# Altium PCB canpowermonitor_micro.PcbDoc
Units mm, origin at the board's own origin, x right, y up, seen from the top; angles counter-clockwise.
Board outline 13 x 33 mm, 2 copper layers (Top Layer, Bottom Layer); 18 components, 23 nets, 108 pads, 64 vias.
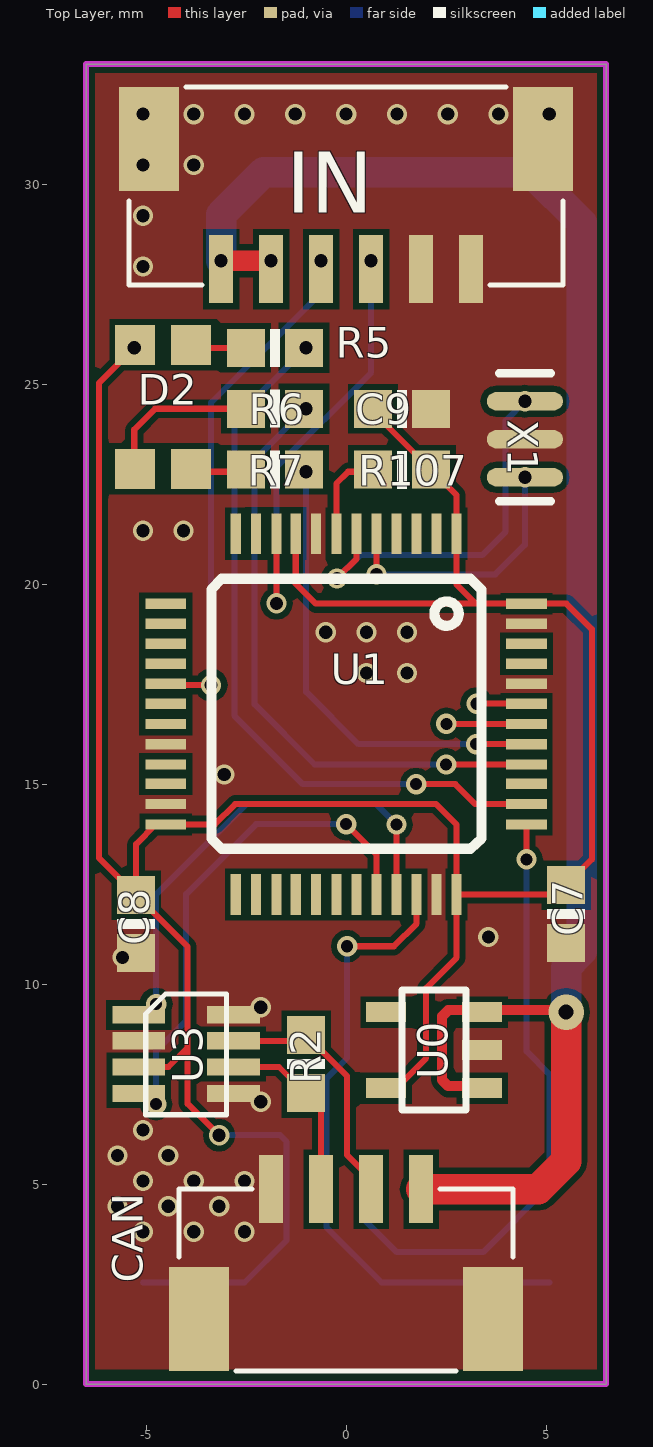
[diagram p0: Top Layer view]
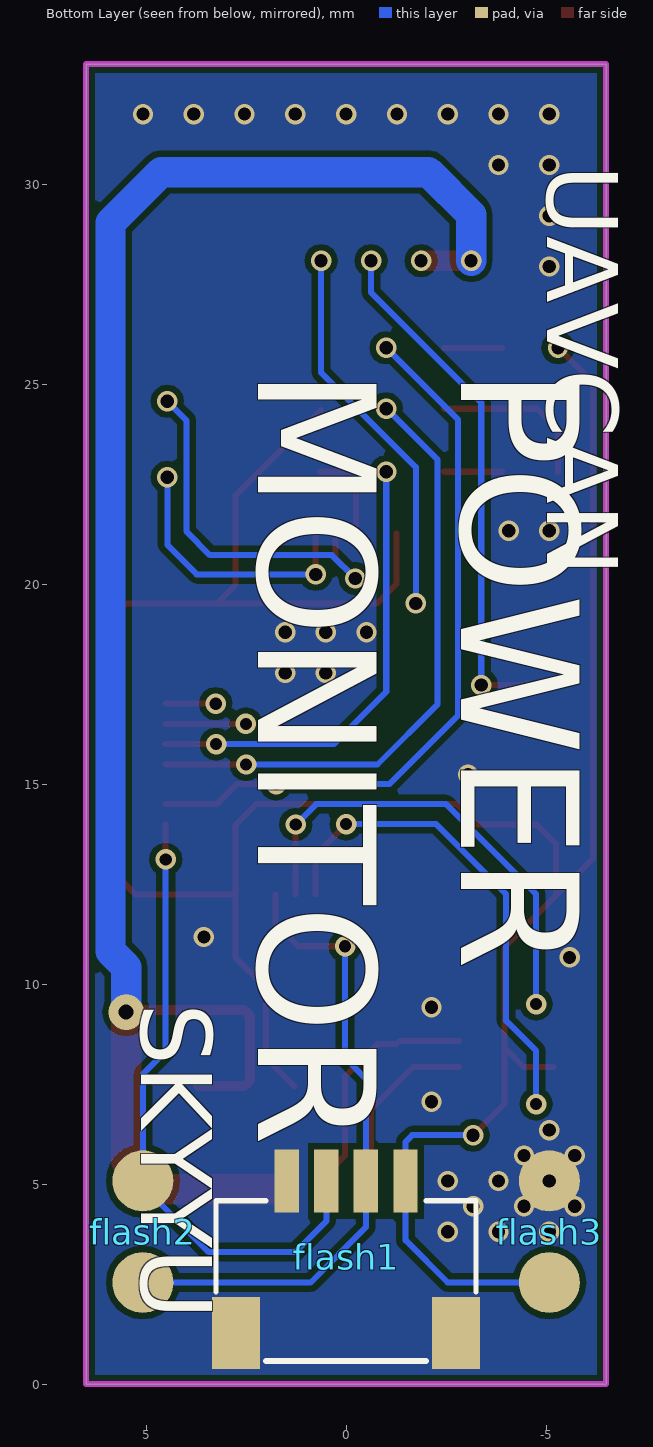
[diagram p1: Bottom Layer view, seen from below]
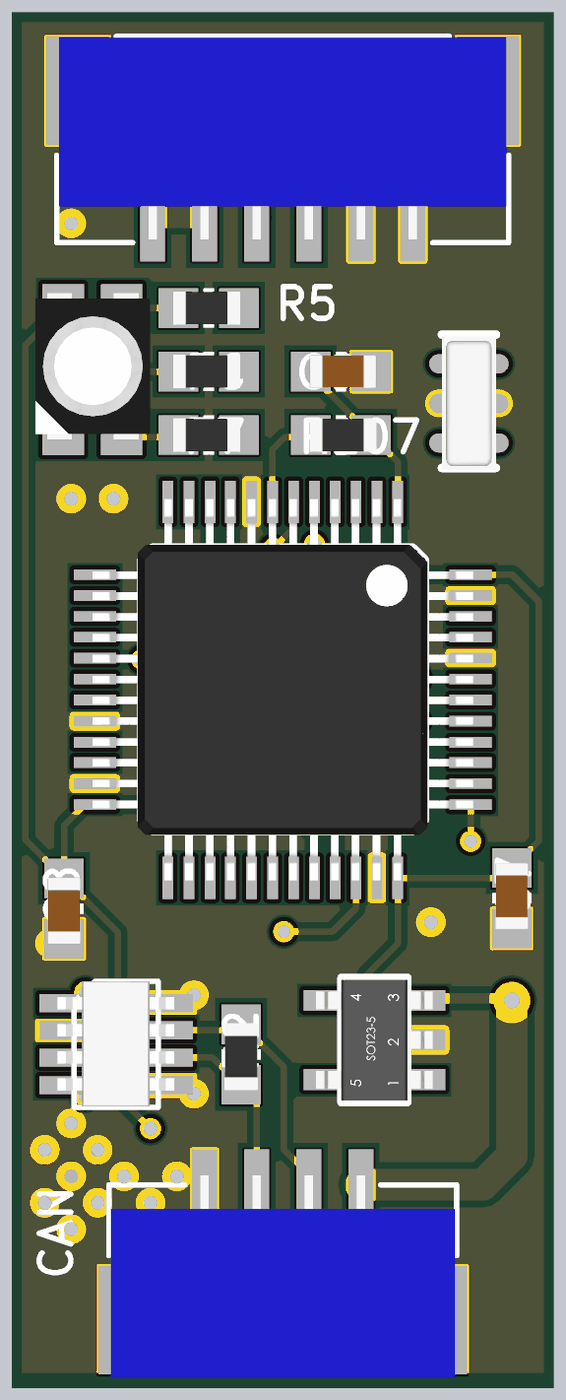
[diagram p2: 3D render of the assembled board from above, using the file's embedded part models]

## Layer stack, top to bottom
Top Solder: solder mask 0.0102, Solder Resist, Dk 3.5
Top Layer: signal copper 0.0356
Dielectric 1: dielectric 0.32, FR-4, Dk 4.8
Bottom Layer: signal copper 0.0356
Bottom Solder: solder mask 0.0102, Solder Resist, Dk 3.5

## Board outline
-6.5,0 6.5,0 6.5,33 -6.5,33

## Design rules (kind name [scope] priority, off if disabled: settings)
Clearance [All] p1: gap=0.152
ComponentClearance [All] p1 off: gap=0.254 collisioncheckmode=3 verticalgap=0.254 showdistances=FALSE
PolygonConnect [All] p1: connectstyle=Direct reliefconductorwidth=0.065 reliefentries=4 polygonreliefangle="90 Angle" airgapwidth=0
RoutingVias [All] p1: holewidth=0.711 width=1.27 viastyle="Through Hole" minholewidth=0.711 minwidth=1.27 maxholewidth=0.711 maxwidth=1.27
SolderMaskExpansion [All] p1: expansion=0.102
Width [All] p1: maxlimit=0.762 minlimit=0.152 preferedwidth=0.254
29 further rules are at their usual default settings.

## Components (designator, comment, footprint, x,y, rotation, side; value= is the part's Value field where it differs from the comment)
C7 "0.1uF" C0603 5.5,11.75 r90 top
C8 "0.1uF" C0603 -5.25,11.5 r270 top
C9 "0.1uF" C0603 1.397,24.384 r0 top
CAN "J-GH1.25-04P" SM04B-GHS-TB 0,3.75 r180 top
D2 "RGB_3528" RGB_3528 -4.572,24.384 r270 top
flash1 "J-SH1.0-04P" SM04B-SRSS-TB 0,5.08 r0 bottom locked
flash2 "PAD2" PAD2_2.54 5.08,3.81 r270 bottom
flash3 "PAD2" PAD2_2.54 -5.08,3.81 r270 bottom
IN "J-GH1.25-06P" SM06B-GHS-TB 0,29 r0 top
R2 "120" R0603 -1,8 r270 top
R5 "10k" R0603 -1.778,25.908 r180 top
R6 "10k" R0603 -1.778,24.384 r180 top
R7 "10k" R0603 -1.778,22.86 r180 top
R107 "10K" R0603 1.397,22.86 r0 top
U0 "MIC5205" SOT23-5 2.2,8.35 r180 top
U1 "STM32F103C8Tx" LQFP48 0,16.75 r270 top
U3 "MAX3051" SOT23-8 -4,8.25 r0 top
X1 "CSTCE8M" XTAL-CSTCE 4.47,23.622 r90 top

## Footprints (in the part's own frame and the unit in brackets; to place one, negate y for a bottom-side part, rotate by r counter-clockwise, add the part's x,y. Pads: shape width x height; smd on the part's side, far side on the other; paste and mask are expansions set on the pad)
C0603 [mm]
  rect 0.95x0.95 smd mask+0.051: 1(-0.725,0) 2(0.725,0)
  silkscreen extent -0.13,-0.48 0.13,0.47, body extent -0.75,-0.4 0.85,0.4, height 0.6
LQFP48 [mil]
  rect 40x10 smd: 1(-177.58,108.68) 2(-177.58,89) 3(-177.58,69.31) 4(-177.58,49.63) 5(-177.58,29.94) 6(-177.58,10.26) 7(-177.58,-9.58) 8(-177.58,-29.58) 9(-177.58,-49.58) 10(-177.58,-68.58) 11(-177.58,-88.58) 12(-177.58,-108.58) 25(177.58,-108.58) 26(177.58,-88.58) 27(177.58,-68.58) 28(177.58,-49.58) 29(177.58,-29.58) 30(177.58,-9.58) 31(177.58,10.26) 32(177.58,29.94) 33(177.58,49.63) 34(177.58,69.31) 35(177.58,89) 36(177.58,108.68)
  rect 10x40 smd: 13(-108.68,-177.58) 14(-89,-177.58) 15(-69.31,-177.58) 16(-49.63,-177.58) 17(-29.94,-177.58) 18(-10.26,-177.58) 19(9.58,-177.58) 20(29.58,-177.58) 21(49.58,-177.58) 22(68.58,-177.58) 23(88.58,-177.58) 24(108.58,-177.58) 37(108.58,177.58) 38(88.58,177.58) 39(68.58,177.58) 40(49.58,177.58) 41(29.58,177.58) 42(9.58,177.58) 43(-10.26,177.58) 44(-29.94,177.58) 45(-49.63,177.58) 46(-69.31,177.58) 47(-89,177.58) 48(-108.68,177.58)
  silkscreen extent -133,-133 133,133, body extent -180,-180 180,180, height 64
PAD2_2.54 [mil]
  round 60 smd: 1(50,0) 2(-50,0)
R0603 [mm]
  rect 0.95x0.95 smd mask+0.051: 1(-0.725,0) 2(0.725,0)
  silkscreen extent -0.13,-0.48 0.13,0.47, body extent -0.75,-0.4 0.85,0.4, height 0.4
RGB_3528 [mm]
  rect 1x1 smd: 1(-1.6,-0.7) 2(-1.6,0.7) 3(1.5,0.7) 4(1.5,-0.7)
  body extent -1.88,-1.36 1.62,1.39, height 1.95
SM04B-GHS-TB [mm]
  rect 0.6x1.7 smd mask+0.051: 1(-1.875,-1.125) 2(-0.625,-1.125) 3(0.625,-1.125) 4(1.875,-1.125)
  rect 1.5x2.6 smd mask+0.051: GND(-3.675,2.125) GND(3.675,2.125)
  silkscreen extent -4.18,-1.12 4.17,3.43, body extent -4.13,-1.35 4.13,3.5, height 4.25
SM04B-SRSS-TB [mil]
  rect 24x62 smd mask+2: 1(-58.5,0) 2(-19.5,0) 3(19.5,0) 4(58.5,0)
  rect 47.24x70.87 smd mask+2: GND(-108.27,149.61) GND(108.27,149.61)
  silkscreen extent -128,19 128,177, body extent -118,-18 118,177, height 116
SM06B-GHS-TB [mm]
  rect 0.6x1.7 smd mask+0.051: 1(-3.125,-1.125) 2(-1.875,-1.125) 3(-0.625,-1.125) 4(0.625,-1.125) 5(1.875,-1.125) 6(3.125,-1.125)
  rect 1.5x2.6 smd mask+0.051: GND(-4.925,2.125) GND(4.925,2.125)
  silkscreen extent -5.43,-1.52 5.43,3.43, body extent -5.38,-1.45 5.38,3.4, height 4.25
SOT23-5 [mm]
  rect 1x0.5 smd: 1(-1.2,0.95) 2(-1.2,0) 3(-1.2,-0.95) 4(1.2,-0.95) 5(1.2,0.95)
  silkscreen extent -0.8,-1.5 0.8,1.5, body extent -1.4,-1.45 1.4,1.45, height 1.09
SOT23-8 [mil]
  rect 52x17 smd: 1(-46.63,38.69) 2(-46.63,13.1) 3(-46.63,-12.69) 4(-46.63,-38.69) 5(46.63,-38.69) 6(46.63,-12.69) 7(46.63,13.1) 8(46.63,38.69)
  silkscreen extent -40,-60 40,59, body extent -56,-59 55,59, height 44
XTAL-CSTCE [mil]
  rrect100% 18x75 smd: 1(-37.4,0) 2(0,0) 3(37.4,0)
  silkscreen extent -61,-26 65,26, body extent -63,-26 63,26, height 40

## Part data
C7 C8 C9: library part Capacitor
R2 R5 R6 R7 R107: library part Resistor

## Via types
v1: diameter 0.508, hole 0.33, Top Layer to Bottom Layer, 52 vias
v2: diameter 0.508, hole 0.305, Top Layer to Bottom Layer, 11 vias
v3: diameter 0.889, hole 0.381, Top Layer to Bottom Layer, 1 vias

## Nets (pads, with @x,y where several pads share a name; then routed paths per layer and width w, separated by ;. In a path a pad name is that pad's centre, name@x,y a point inside that pad or via, vN(x,y) a via of type N, cw(c..) or ccw(c..) an arc to the next point about the centre after c; other vN are vias at no path point)
3.3V: C7.2 C8.1 C9.1 D2.1 flash1.1 flash3.1 R107.2 U0.5 U1.1 U1.9 U1.24 U1.36 U1.48 U3.3 | length 72.7
  Top Layer w0.152: v1(-5.297,25.908) -6.176,25.03 -6.176,13.151 C8.1 ; U3.3 -4.442,7.928 -3.962,8.407 ; v1(-3.175,6.223) -3.962,7.01 -3.962,8.407 ; U1.9 -1.259,20.009 -0.761,19.511 3.239,19.511 ; C9.1@0.635,24.347 2.761,22.221 2.761,19.989 3.239,19.511 ; U0.5@1.3,7.45 2,8.15 2,9.9 2.761,10.661 2.761,13.989 2.25,14.5 -2.772,14.5 -3.28,13.992 -4.758,13.992 -5.25,13.5 C8.1 ; U1.36 5.264,12.239 C7.2 6.143,13.118 6.143,18.876 5.508,19.511 3.239,19.511 ; C8.1 -3.962,10.937 -3.962,8.407
  Bottom Layer w0.152: flash3.1 -2.54,2.54 -1.486,3.594 -1.486,6.058 -1.651,6.223 v1@-3.302,6.223
CANH: CAN.2 R2.1 U3.7 | length 5.9
  Top Layer w0.152: U3.7 R2.1@-1.333,8.583 ; R2.1@-1.25,8.5 -0.775,8.5 0.025,7.7 0.025,5.725 CAN.2@0.625,5.125
CANL: CAN.3 R2.2 U3.6 | length 4.6
  Top Layer w0.152: U3.6 -1.678,7.928 -0.625,6.875 CAN.3
GND: C7.1 C8.2 C9.2 CAN.4 CAN.GND flash1.4 flash1.GND flash3.2 IN.5 IN.6 IN.GND U0.2 U1.8 U1.20 U1.23 U1.35 U1.44 U1.47 U3.2 U3.5 U3.8 X1.2
  other v1: -5.08,3.81 -3.81,3.81 -2.54,3.81 -5.715,4.445 -4.445,4.445 -3.175,4.445 -5.08,5.08 -3.81,5.08 -2.54,5.08 -5.715,5.715 -4.445,5.715 -5.08,6.35 -2.134,7.061 -2.134,9.423 -5.588,10.668 3.556,11.176 -3.048,15.24 0.508,17.78 1.524,17.78 -0.508,18.796 0.508,18.796 1.524,18.796 -5.08,21.336 -4.064,21.336 -5.08,27.94 -5.08,29.21 -5.08,30.48 -3.81,30.48 -5.08,31.75 -3.81,31.75 -2.54,31.75 -1.27,31.75 0,31.75 1.27,31.75 2.54,31.75 3.81,31.75 5.08,31.75
NetD2_2: D2.2 R5.2 | length 1.4
  Top Layer w0.152: D2.2@-3.897,25.908 R5.2@-2.452,25.908
NetD2_3: D2.3 R7.2 | length 1.4
  Top Layer w0.152: D2.3@-3.896,22.809 R7.2@-2.452,22.809
NetD2_4: D2.4 R6.2 | length 4.1
  Top Layer w0.152: D2.4@-5.297,22.808 -5.297,23.862 -4.775,24.384 R6.2@-2.452,24.384
Netflash1_2: flash1.2 flash2.1 U1.34 | length 16.1
  Top Layer w0.152: v2(0.025,10.947) 1.194,10.947 1.761,11.514 U1.34
  Bottom Layer w0.152: v2(0.025,10.947) 0.025,8.153 -0.495,7.633 -0.495,3.924 0.889,2.54 flash2.1
Netflash1_3: flash1.3 flash2.2 U1.37 | length 15.9
  Top Layer w0.152: v2(4.511,13.118) U1.37
  Bottom Layer w0.152: flash1.3 0.495,4.077 1.27,3.302 3.429,3.302 5.08,4.953 5.08,7.747 4.511,8.316 v2(4.511,13.118)
NetIN_3: IN.3 U1.17 | length 12.9
  Top Layer w0.152: U1.17 -4.475,17.475 v1(-3.378,17.475)
  Bottom Layer w0.152: v1(-3.378,17.475) -3.378,24.536 -0.625,27.29 v1(-0.625,28.085)
NetIN_4: IN.4 U1.10 | length 11.3
  Top Layer w0.152: v1(-1.742,19.518) U1.10
  Bottom Layer w0.152: v1(-1.742,19.518) -1.742,22.921 0.625,25.288 v1(0.625,28.085)
NetR5_1: R5.1 U1.38 | length 18.2
  Top Layer w0.152: v2(1.75,15) 2.729,15 3.229,14.5 U1.38
  Bottom Layer w0.152: v1(-1.002,25.908) -2.794,24.116 -2.794,16.713 -1.081,15 v2(1.75,15)
NetR6_1: R6.1 U1.40 | length 15.4
  Top Layer w0.152: v2(2.5,15.491) U1.40
  Bottom Layer w0.152: v1@-0.991,24.409 -2.286,23.114 -2.286,16.993 -0.784,15.491 v2(2.5,15.491)
  other v1: -1.002,24.384
NetR7_1: R7.1 U1.41 | length 11.6
  Top Layer w0.152: v2@3.25,15.999 U1.41
  Bottom Layer w0.152: v1(-1.002,22.809) -1.002,17.309 0.307,16 v2(3.25,16)
NetR107_1: R107.1 U1.7 | length 2.3
  Top Layer w0.152: U1.7 -0.243,22.515 0.051,22.809 R107.1@0.647,22.809
NetU1_5: U1.5 X1.1 | length 6.7
  Top Layer w0.152: v1(0.761,20.244) U1.5
  Bottom Layer w0.152: v1(0.761,20.244) 3.734,20.244 4.47,20.98 v1(4.47,22.672)
NetU1_6: U1.6 X1.3 | length 9.5
  Top Layer w0.152: v1(-0.229,20.142) 0.261,20.631 U1.6
  Bottom Layer w0.152: v1(-0.229,20.142) 0.356,20.726 3.404,20.726 3.988,21.311 3.988,24.089 v1(4.47,24.572)
NetU1_18: U1.18
NetU1_32: U1.32 U3.4 | length 12.4
  Top Layer w0.152: v2(0,14) 0.761,13.239 U1.32
  Bottom Layer w0.152: v2(-4.75,7) -4.75,8.331 -4,9.081 -4,12.25 -2.25,14 v2(0,14)
NetU1_33: U1.33 U3.1 | length 11.7
  Top Layer w0.152: U1.33 v2(1.261,13.989)
  Bottom Layer w0.152: v2(-4.75,9.5) -4.75,12.25 -2.5,14.5 0.75,14.5 v2(1.261,13.989)
NetU1_42: U1.42 | length 2
  Top Layer w0.152: v2(2.507,16.507) U1.42
NetU1_43: U1.43 | length 1.3
  Top Layer w0.152: v2(3.261,17.011) U1.43
VIN: CAN.1 IN.1 IN.2 U0.1 U0.3 | length 46
  Top Layer w0.254: U0.1@3.7,7.45 2.55,7.45 2.4,7.6 2.4,9.2 2.55,9.35 5.399,9.35 v3@5.5,9.249
  Top Layer w0.508: v1(-3.125,28.085) v1(-1.875,28.085)
  Top Layer w0.762: CAN.1 4.799,4.875 5.5,5.576 v3@5.5,9.249
  Bottom Layer w0.762: v1@-3.128,28.085 -3.128,29.232 -2.057,30.302 4.623,30.302 5.89,29.035 5.89,10.818 5.5,10.428 v3(5.5,9.3)
pads on no net: U0.4 U1.2 U1.3 U1.4 U1.11 U1.12 U1.13 U1.14 U1.15 U1.16 U1.19 U1.21 U1.22 U1.25 U1.26 U1.27 U1.28 U1.29 U1.30 U1.31 U1.39 U1.45 U1.46

## Polygon pours and split planes (outlines as drawn)
GND on Top Layer "Top Layer-No Net" (solid, remove dead copper, pour order 8): -7.646,34.233 7.594,34.233 7.594,0.37 -7.646,0.37
GND on Bottom Layer "Top Layer-No Net" (solid, remove dead copper, pour order 10): -7.669,34.233 7.571,34.233 7.571,-0.067 -7.669,-0.067

## Keep-outs
Keep-Out Layer:
  the board outline again, w0.152

## Silkscreen, mask and mechanical layers (free items; w line width, h text height)
Bottom Overlay:
  text "UAVCAN" at -4.445,30.48 h3.05 r90
  text "POWER / MONITOR" at 3.175,25.4 h5.08 r90
  text "SKYYU" at 5.715,9.525 h3.05 r90